# Altium PCB PCB.PcbDoc
Units mm, origin at the board's own origin, x right, y up, seen from the top; angles counter-clockwise.
Board outline 41 x 25.36 mm, 2 copper layers (TOP, BOTTOM), stack 1.586 mm thick; 47 components, 24 nets, 125 pads, 65 vias.
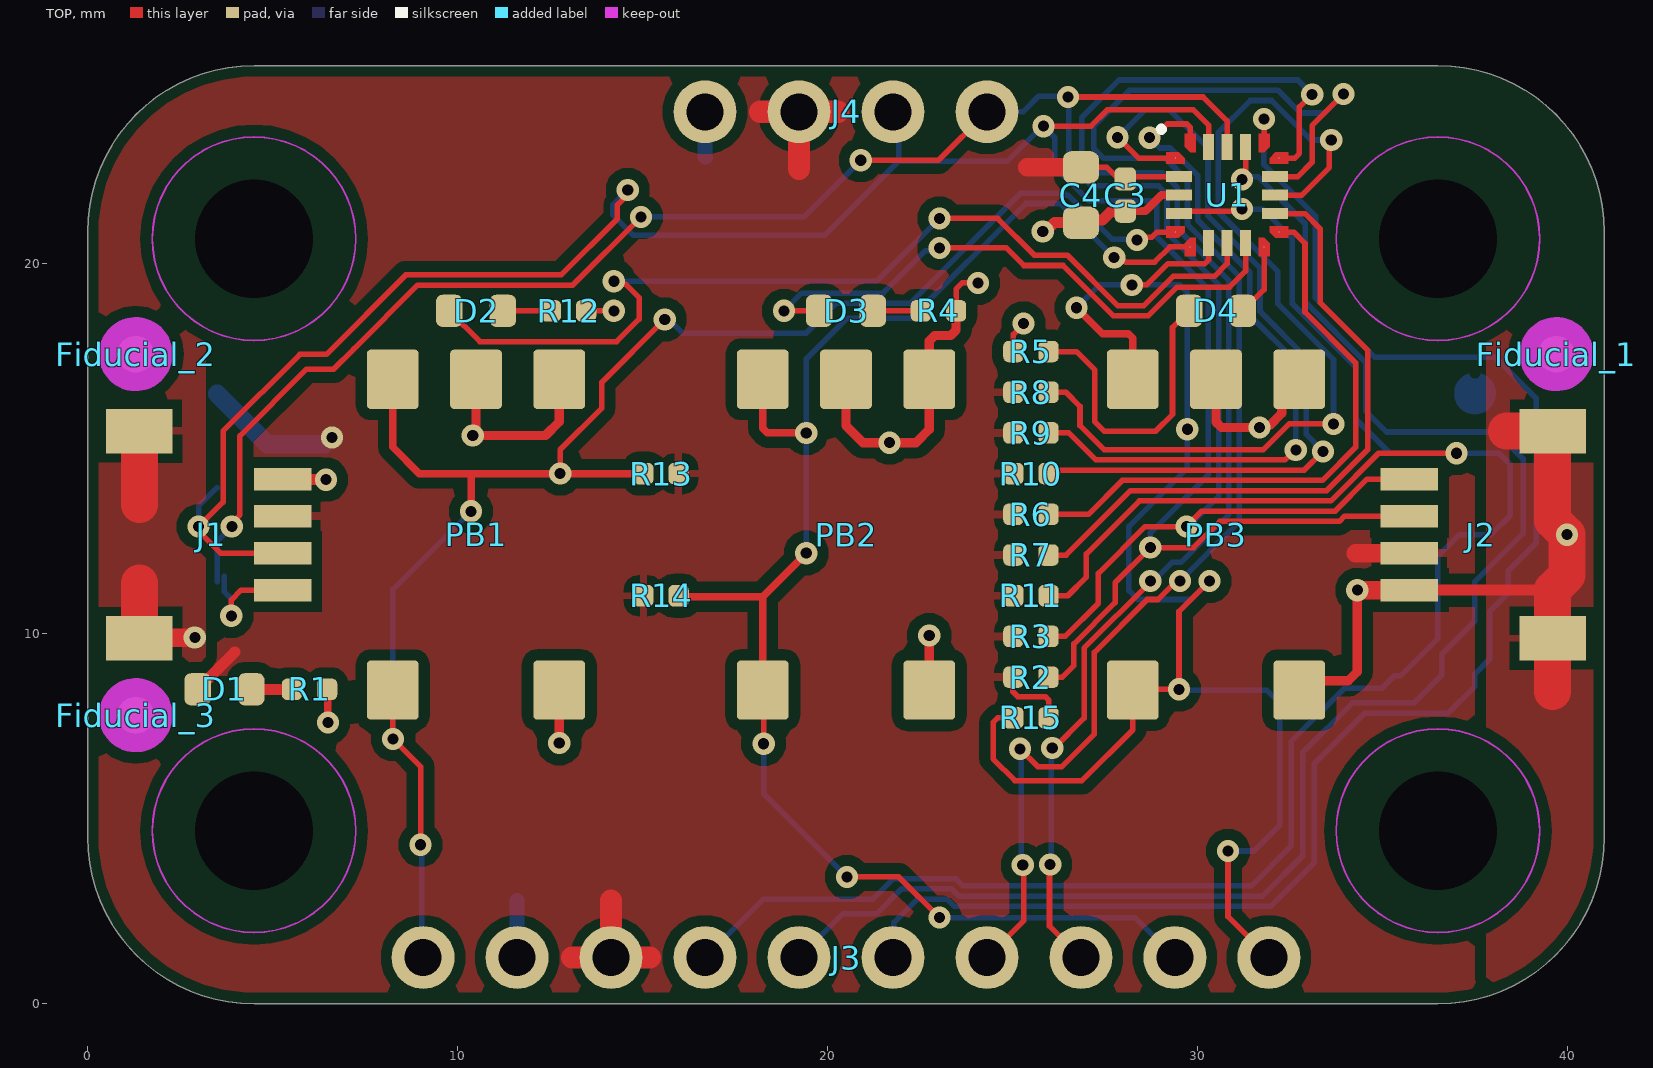
[diagram p0: TOP view]
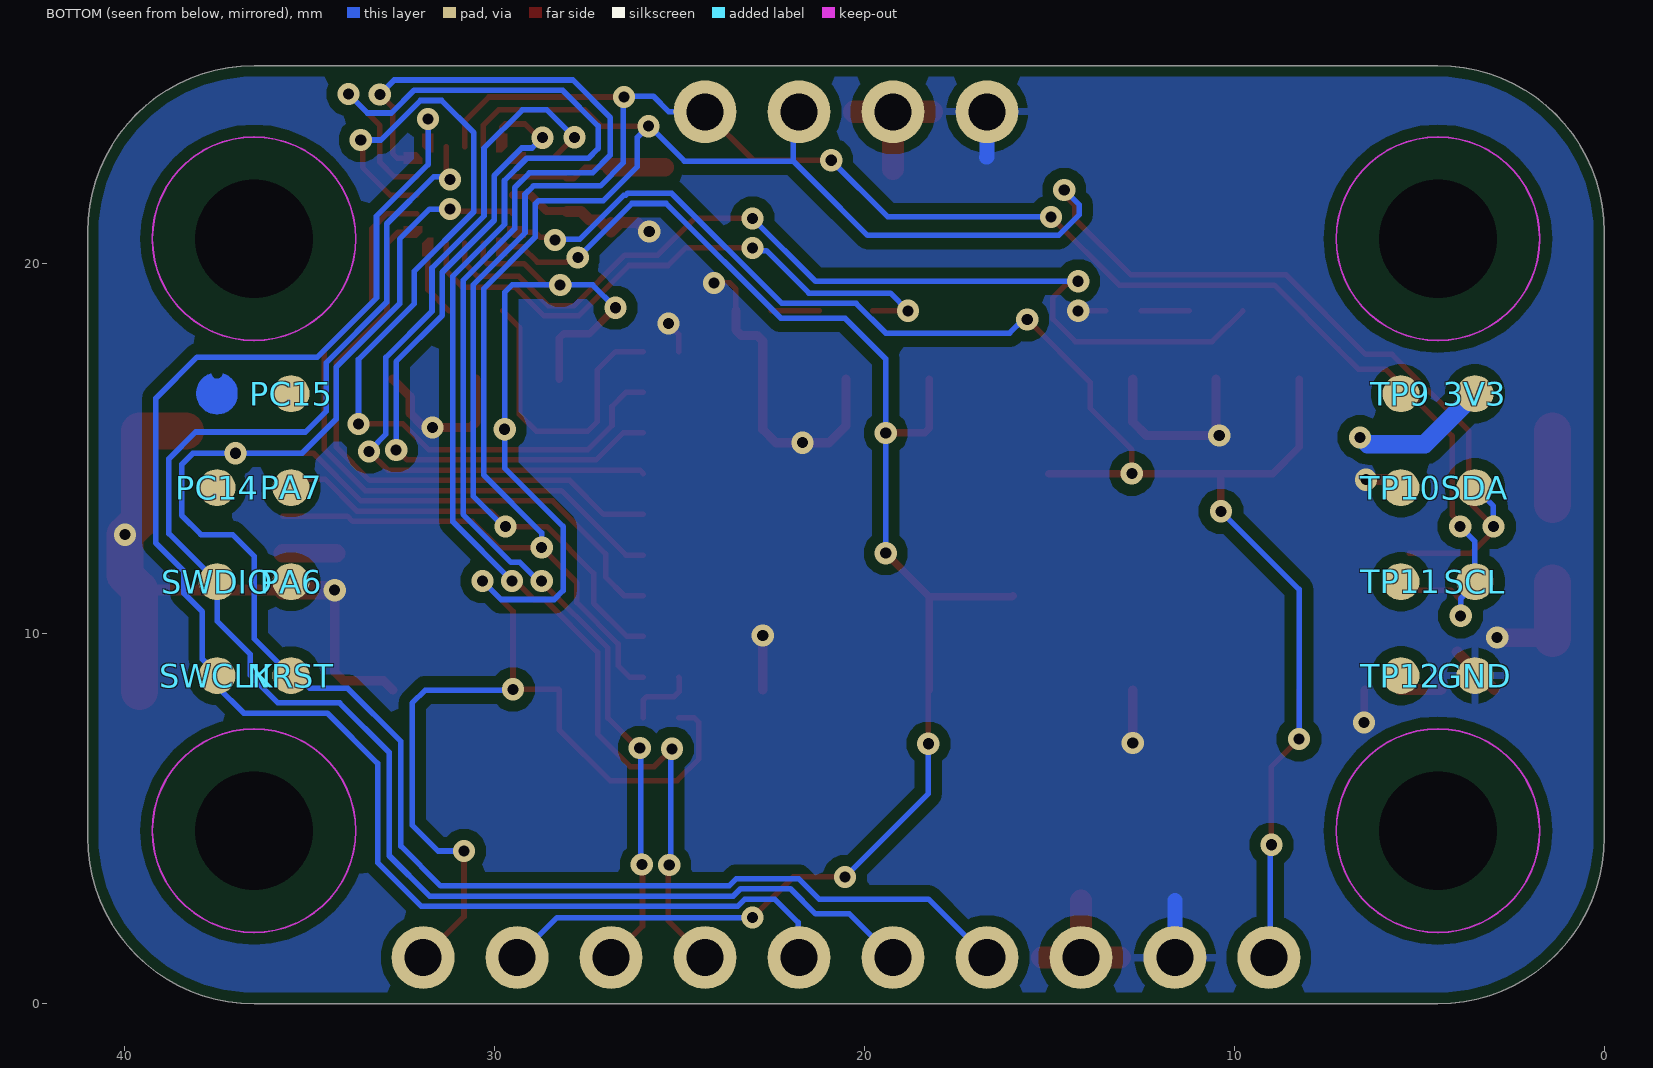
[diagram p1: BOTTOM view, seen from below]
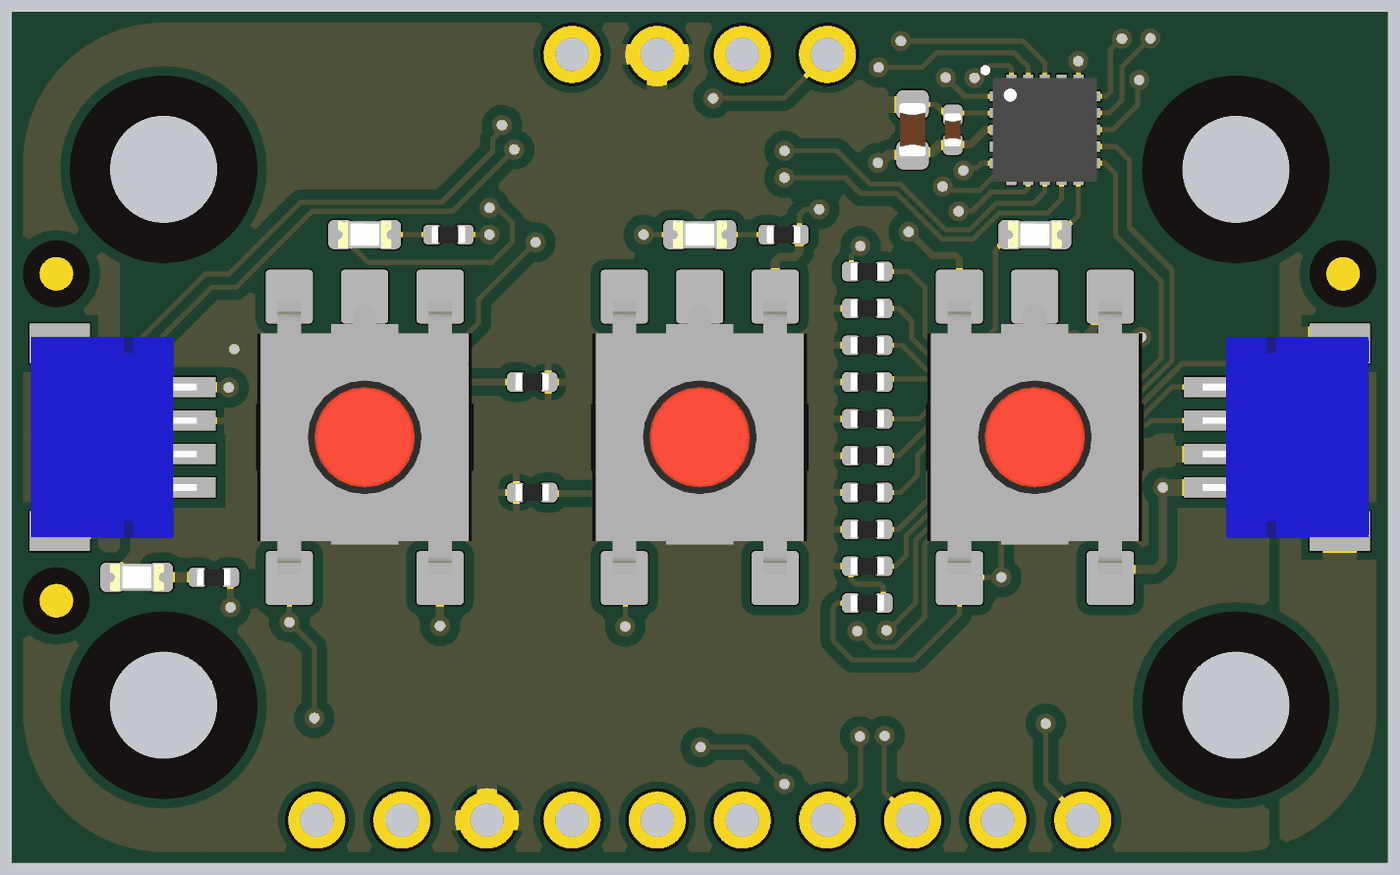
[diagram p2: 3D render of the assembled board from above, using the file's embedded part models]

## Layer stack, top to bottom
Top Solder: solder mask 0.01, Solder Resist, Dk 3.5
TOP: signal copper 0.018
Dielectric: core 1.55, FR-4, Dk 4.8
BOTTOM: signal copper 0.018
Bottom Solder: solder mask 0.01, Solder Resist, Dk 3.5

## Board outline
0,4.5 ccw(c4.5,4.5) 4.5,0 36.5,0 ccw(c36.5,4.5) 41,4.5 41,20.86 ccw(c36.5,20.86) 36.5,25.36 4.5,25.36 ccw(c4.5,20.86) 0,20.86

## Design rules (kind name [scope] priority, off if disabled: settings)
BoardOutlineClearance Mousebites [(ObjectKind = 'Pad') And (Name = 'Free-MOUSEBITE')] p1: gap=0 ignorepadtopadclearanceinfootprint=FALSE
BoardOutlineClearance Silks [(OnLayer('Top Overlay') OR OnLayer('Bottom Overlay'))] p2: gap=0 ignorepadtopadclearanceinfootprint=FALSE
BoardOutlineClearance [All] p3: gap=0.3 ignorepadtopadclearanceinfootprint=FALSE
Clearance COPPER_0.3mm [All] p1: gap=0.127 ignorepadtopadclearanceinfootprint=FALSE except(0.3: Arc-Fill Arc-Poly Arc-Region Track-Fill Track-Poly Track-Region SMDPad-Fill SMDPad-Poly SMDPad-Region THPad-Fill THPad-Poly THPad-Region Via-Fill Via-Poly Via-Region Fill-Fill Fill-Poly Fill-Region Poly-Poly Poly-Region Region-Region)
Clearance "Generic clearance 0.15mm" [All] p2: gap=0.15 ignorepadtopadclearanceinfootprint=TRUE
ComponentClearance [All] p1: gap=0.2 collisioncheckmode=3 verticalgap=0 showdistances=TRUE
DiffPairsRouting USB [InDifferentialPairClass('USB')] p1: maxlimit=0.15 minlimit=0.15 mostfreqgap=0.15 toplayer_minwidth=0.15 toplayer_maxwidth=0.21 toplayer_prefwidth=0.2 bottomlayer_minwidth=0.15 bottomlayer_maxwidth=0.21 bottomlayer_prefwidth=0.2 impedanceprofiledriven=TRUE impedanceprofileid={E6B00C31-4C8E-439C-824F-D2B2CDC26F9C} impedanceprofilevalue=90.000000 maxuncoupledlength=12.7
Height [All] p1: minheight=0 maxheight=30 prefheight=12.7
HoleSize [All] p1: absolutevalues=TRUE maxlimit=30 minlimit=0.3 maxpercent=80.000 minpercent=20.000
HoleToHoleClearance [All] p1: gap=0.25 allowstackedmicrovias=FALSE
MinimumAnnularRing [All] p1: minimumring=0.15
PlaneConnect [All] p1: pad.planeconnectstyle=Relief pad.reliefexpansion=0.508 pad.reliefentries=4 pad.reliefconductorwidth=0.254 pad.reliefairgap=0.254 via.planeconnectstyle=Direct via.reliefexpansion=0.508 via.reliefentries=4 via.reliefconductorwidth=0.254 via.reliefairgap=0.254
PolygonConnect [All] p1: thpad.connectstyle=Relief thpad.reliefconductorwidth=0.2 thpad.reliefentries=4 thpad.polygonreliefangle="90 Angle" thpad.airgapwidth=0.254 smdpad.connectstyle=Relief smdpad.reliefconductorwidth=0.2 smdpad.reliefentries=4 smdpad.polygonreliefangle="90 Angle" smdpad.airgapwidth=0.254 via.connectstyle=Direct via.reliefconductorwidth=0.254 via.reliefentries=4 via.polygonreliefangle="90 Angle" via.airgapwidth=0.254
RoomDefinition TOP [InComponentClass('TOP')] p1: confinementstyle=ConfineIn formatcopy=TRUE lockcomponents=FALSE outline -26.2,-22.88 24.6,-22.88 24.6,2.52 -26.2,2.52
RoutingVias StandardVias [All] p1: holewidth=0.3 width=0.6 viastyle="Through Hole" minholewidth=0.3 minwidth=0.6 maxholewidth=0.3 maxwidth=0.6
SMDToCorner [All] p1: distance=39370
SilkToSilkClearance [All] p1: silktosilkclearance=0.2
SilkToSolderMaskClearance [IsPad] p1: minsilkscreentomaskgap=0.15 clearancetoexposedcopper=TRUE
SolderMaskExpansion VIAtented [IsVia] p1: expansion=0.102 istentingtop=TRUE
SolderMaskExpansion [All] p2: expansion=0.05 istentingtop=FALSE
UnConnectedPin [All] p1:
UnRoutedNet [not WithinRoom('K36')] p1: checkbadconnections=TRUE
ViasUnderSMD [All] p1: allowed=FALSE
Width StandardTraces [All] p1: maxlimit=5 minlimit=0.15 preferedwidth=0.15 minimp=50.000000 maximp=50.000000 favimp=50.000000
21 further rules are at their usual default settings.

## Classes and differential pairs
component class TOP: 3V3 D1 D2 D3 D4 Fiducial_1 Fiducial_2 Fiducial_3 GND J1 J2 J3 J4 NRST PA6 PA7 PB1 PB2 PB3 PC14 PC15 R1 R4 R5 R12 R13 R14 R15 SCL SDA SWCLK SWDIO TP9 TP10 TP11 TP12
component class U_MICROCONTROLLER: C3 C4 R2 R3 R6 R7 R8 R9 R10 R11 U1

## Components (designator, comment, footprint, x,y, rotation, side; value= is the part's Value field where it differs from the comment)
3V3 "Test point 1.00mm" TP-1.00MM 3.5,16.49 r90 bottom
C3 "0402B104K160CT" CAP-0402 28.05,21.86 r270 top value=100nF
C4 "GRM188R61C475KAAJD" CAP-0603 26.85,21.86 r90 top value=4.7µF
D1 "HSMG-C190" LEDC1608X80N-AK 3.7,8.5 r180 top
D2 "KPT-1608SECK" LEDC1608X80N-AK 10.5,18.73 r180 top
D3 "KPT-1608SECK" LEDC1608X80N-AK 20.5,18.73 r180 top
D4 "KPT-1608SECK" LEDC1608X80N-AK 30.5,18.73 r0 top
Fiducial_1 "Fiducial mark 1mm" "Fiducial mark 1mm-Footprint-1" 39.7,17.56 r270 top
Fiducial_2 "Fiducial mark 1mm" "Fiducial mark 1mm-Footprint-1" 1.3,17.56 r270 top
Fiducial_3 "Fiducial mark 1mm" "Fiducial mark 1mm-Footprint-1" 1.3,7.8 r270 top
GND "Test point 1.00mm" TP-1.00MM 3.5,8.87 r90 bottom
J1 "SM04B-SRSS-TB(LF)(SN)" SM04B-SRSS-TB(LF)(SN)-Footprint-1 3.337,12.68 r90 top locked
J2 "SM04B-SRSS-TB(LF)(SN)" SM04B-SRSS-TB(LF)(SN)-Footprint-1 37.663,12.68 r270 top locked
J3 "HEADER TH 2.54mm VERT. 1x010POS" "PIN HEADER 2.54mm VERT. 1x10POS" 20.5,1.25 r0 top
J4 "HEADER TH 2.54mm VERT. 1x004POS" "PIN HEADER 2.54mm VERT. 1x4POS-Footprint-1" 20.5,24.11 r0 top
NRST "Test point 1.00mm" TP-1.00MM 35.5,8.87 r180 bottom
PA6 "Test point 1.00mm" TP-1.00MM 35.5,11.41 r180 bottom
PA7 "Test point 1.00mm" TP-1.00MM 35.5,13.95 r180 bottom
PB1 "IT-1157AHNP-W160GGTR" TS42 10.5,12.68 r90 top locked
PB2 "IT-1157AHNP-W160GGTR" TS42 20.5,12.68 r90 top locked
PB3 "IT-1157AHNP-W160GGTR" TS42 30.5,12.68 r90 top locked
PC14 "Test point 1.00mm" TP-1.00MM 37.5,13.95 r180 bottom
PC15 "Test point 1.00mm" TP-1.00MM 35.5,16.49 r180 bottom
R1 "CRCW04021K00FKEDC" RES-0402 6,8.5 r180 top value=1k
R2 "RC0402FR-074K7L" RES-0402 25.5,8.83 r180 top value=4.7k
R3 "RC0402FR-074K7L" RES-0402 25.5,9.93 r180 top value=4.7k
R4 "CRCW0402330RJNED" RES-0402 23,18.73 r180 top value=330
R5 "CRCW0402330RJNED" RES-0402 25.5,17.63 r0 top value=330
R6 "RC0402FR-074K7L" RES-0402 25.5,13.23 r0 top value=4.7k
R7 "RC0402FR-074K7L" RES-0402 25.5,12.13 r0 top value=4.7k
R8 "RC0402FR-074K7L" RES-0402 25.5,16.53 r0 top value=4.7k
R9 "RC0402FR-074K7L" RES-0402 25.5,15.43 r0 top value=4.7k
R10 "RC0402FR-074K7L" RES-0402 25.5,14.33 r0 top value=4.7k
R11 "RC0402FR-074K7L" RES-0402 25.5,11.03 r0 top value=4.7k
R12 "CRCW0402330RJNED" RES-0402 13,18.73 r180 top value=330
R13 "RC0402FR-074K7L" RES-0402 15.5,14.33 r0 top value=4.7k
R14 "RC0402FR-074K7L" RES-0402 15.5,11.03 r180 top value=4.7k
R15 "RC0402FR-074K7L" RES-0402 25.5,7.73 r0 top value=4.7k
SCL "Test point 1.00mm" TP-1.00MM 3.5,11.41 r90 bottom
SDA "Test point 1.00mm" TP-1.00MM 3.5,13.95 r90 bottom
SWCLK "Test point 1.00mm" TP-1.00MM 37.5,8.87 r180 bottom
SWDIO "Test point 1.00mm" TP-1.00MM 37.5,11.41 r180 bottom
TP9 "Test point 1.00mm" TP-1.00MM 5.5,16.49 r0 bottom
TP10 "Test point 1.00mm" TP-1.00MM 5.5,13.95 r0 bottom
TP11 "Test point 1.00mm" TP-1.00MM 5.5,11.41 r0 bottom
TP12 "Test point 1.00mm" TP-1.00MM 5.5,8.87 r0 bottom
U1 "STM32C011F4U6TR" UFQFPN20 30.8,21.86 r0 top

## Footprints (in the part's own frame and the unit in brackets; to place one, negate y for a bottom-side part, rotate by r counter-clockwise, add the part's x,y. Pads: shape width x height; smd on the part's side, far side on the other; paste and mask are expansions set on the pad)
CAP-0402 [mm] "Chip Capacitor, 2-Leads, Body  0402 (in) 1005 (mm), IPC Medium Density"
  rrect52% 0.63x0.58 smd mask+0.05: 1(-0.435,0) 2(0.435,0)
  body extent -0.5,-0.25 0.5,0.25, height 0.5
CAP-0603 [mm] "Chip Capacitor, Body 0603 imperial,1.6x0.8mm, IPC High Density"
  rrect51% 0.87x0.97 smd mask+0.05: 1(-0.75,0) 2(0.75,0)
  body extent -0.8,-0.4 0.8,0.4, height 0.8
"Fiducial mark 1mm-Footprint-1" [mm]
  round 1 smd paste-10 mask+0.5: 1(0,0)
  TOP keep-out circle w1: c0,0 r0.5
LEDC1608X80N-AK [mm]
  rrect50% 0.72x0.87 smd: A(0.725,0) C(-0.725,0)
  body extent -0.8,-0.4 0.8,0.4, height 0.79
"PIN HEADER 2.54mm VERT. 1x4POS-Footprint-1" [mm]
  round 1.7 hole 1 mask+0.1: 1(-3.81,0) 2(-1.27,0) 3(1.27,0) 4(3.81,0)
"PIN HEADER 2.54mm VERT. 1x10POS" [mm]
  round 1.7 hole 1 mask+0.1: 1(-11.43,0) 2(-8.89,0) 3(-6.35,0) 4(-3.81,0) 5(-1.27,0) 6(1.27,0) 7(3.81,0) 8(6.35,0) 9(8.89,0) 10(11.43,0)
RES-0402 [mm] "Chip Resistor, 2-Leads, Body  0402 (in) 1005 (mm), IPC Medium Density"
  rrect51% 0.55x0.58 smd mask+0.05: 1(-0.475,0) 2(0.475,0)
  body extent -0.5,-0.25 0.5,0.25, height 0.34
SM04B-SRSS-TB(LF)(SN)-Footprint-1 [mm]
  rect 0.6x1.55 smd mask+0.05: 1(1.5,-1.937) 2(0.5,-1.937) 3(-0.5,-1.937) 4(-1.5,-1.937)
  rect 1.2x1.8 smd mask+0.05: FIX(-2.8,1.938) FIX(2.8,1.938)
  body extent -3,-2.16 3,2.8, height 2.98
TP-1.00MM [mm]
  rrect100% 1x1 smd paste-2.54: X(0,0)
TS42 [mm]
  rrect15% 1.6x1.4 smd: 1(4.2,-2.25) 2(-4.2,-2.25) 3(4.2,2.25) 4(-4.2,2.25)
  rrect15% 1.6x1.4 smd paste+0: 5(4.2,0)
  body extent -4.1,-3.25 4.1,3.25, height 2.6
UFQFPN20 [mm] "QFN, 20-Leads, Body 3.00x3.00mm, Pitch 0.50mm, IPC Medium Density"
  round 0.025 smd mask+0.05: 1(-1.4,1) 5(-1.4,-1) 6(-1,-1.4) 10(1,-1.4) 11(1.4,-1) 15(1.4,1) 16(1,1.4) 20(-1,1.4)
  rect 0.7x0.3 smd mask+0.05: 2(-1.3,0.5) 3(-1.3,0) 4(-1.3,-0.5) 12(1.3,-0.5) 13(1.3,0) 14(1.3,0.5)
  rect 0.3x0.7 smd mask+0.05: 7(-0.5,-1.3) 8(0,-1.3) 9(0.5,-1.3) 17(0.5,1.3) 18(0,1.3) 19(-0.5,1.3)
  TOP region: -0.85,-1.65 -1.15,-1.65 -1.15,-1.3 -1,-1.15 -0.85,-1.15
  TOP region: -1.3,-1.15 -1.15,-1 -1.15,-0.85 -1.65,-0.85 -1.65,-1.15
  TOP region: 1.15,-1.65 0.85,-1.65 0.85,-1.15 1,-1.15 1.15,-1.3
  TOP region: 1.65,1.15 1.65,0.85 1.15,0.85 1.15,1 1.3,1.15
  TOP region: 1,1.15 0.85,1.15 0.85,1.65 1.15,1.65 1.15,1.3
  TOP region: -1.15,1 -1.15,0.85 -1.65,0.85 -1.65,1.15 -1.3,1.15
  TOP region: -1.15,1.3 -1,1.15 -0.85,1.15 -0.85,1.65 -1.15,1.65
  TOP region: 1.65,-0.85 1.65,-1.15 1.3,-1.15 1.15,-1 1.15,-0.85
  silkscreen extent -1.8,1.75 -1.75,1.8, body extent -1.55,-1.55 1.55,1.55, height 0.6

## Part data
3V3 GND NRST PA6 PA7 PC14 PC15 SCL SDA SWCLK SWDIO TP9 TP10 TP11 TP12: library part UT0013-A.6, Manufacturer="This is not a component", Code Arduino="This is not a component", Design Item ID=CMP-018-0005-A.3, Part Number="This is not a component", Pin Count=1, Source=ut.SchLib
C3: library part C0012-A.15, "CAP CHIP 0402 100nF 10% 16V X7R", Case Code (Imperial)=0402, Dielectric=X7R, Manufacturer=Walsin, Tolerance=10%, Voltage=16V, Code Arduino=0132, Part Number=0402B104K160CT, Technology=Ceramic
C4: library part C0054-A.16, "CAP CHIP 0603 4.7uF 10% 16V X5R", Case Code (Imperial)=0603, Dielectric=X5R, Manufacturer=Murata, Manufacturer 3="Samsung Electro-Mechanics", Part number 2=GRM188R61C475KE11D, Part number 3=CL10A475KO8NNNC, Tolerance=10%, Voltage=16V, Code Arduino=A5072, Manufacturer 2=Murata, Part Number=GRM188R61C475KAAJD, Technology=Ceramic
D1: library part L0009-A.5, "LED SMD 0603 GREEN/568 15mcd 120^", Manufacturer=Broadcom, Code Arduino=2204, Part Number=HSMG-C190, Pin Count=2
D2 D3 D4: library part L0006-A.5, "LED SMD 0603 ORANGE601 250mcd 120^", Manufacturer=Kingbright, Code Arduino=2207, Part Number=KPT-1608SECK, Pin Count=2
Fiducial_1 Fiducial_2 Fiducial_3: library part UT0023-A.7, "Fiducial mark 1mm clearance 2mm"
J1 J2: library part J0005-A.2, "CONN JST 4POS SIDE 1MM TIN QWIIC", Manufacturer=JST, Code Arduino=J0005, Part Number=SM04B-SRSS-TB(LF)(SN)
J3: library part J0169-A.8, Code Arduino=J0169
J4: library part J0162-A.5, Code Arduino=J0162
PB1 PB2 PB3: library part B0005-A.9, "PUSHBUTTON SMD 6x6 5 PINS", Manufacturer=Switronic, Code Arduino=0946, Part Number=IT-1157AHNP-W160GGTR
R1: library part R0007-A.24, "RES CHIP 0402 1k 1% 1/16W", Case Code (Imperial)=0402, Manufacturer=Vishay, Power=62.5mW, Temperature Coefficient=100ppm, Tolerance=1%, Code Arduino=0140, Part Number=CRCW04021K00FKEDC, Technology="Thick film"
R2 R3 R6 R7 R8 R9 R10 R11 R13 R14 R15: library part R0013-A.24, "RES CHIP 0402 4k7 1% 1/16W", Case Code (Imperial)=0402, Manufacturer=YAGEO, Power=62.5mW, Temperature Coefficient=200ppm, Tolerance=1%, Code Arduino=2196, Part Number=RC0402FR-074K7L, Technology="Thick film"
R4 R5 R12: library part R0017-A.24, "RES CHIP 0402 330R 5% 1/16W", Case Code (Imperial)=0402, Manufacturer=Vishay, Power=62.5mW, Temperature Coefficient=200ppm, Tolerance=5%, Code Arduino=2229, Part Number=CRCW0402330RJNED, Technology="Thick film"
U1: library part U0363-A.3, "IC Cortex M0, 32b MCU, 32KB Flash, 6KB RAM, VDD 2-3.6V, -40°C to 85°C, QFN20 3x3mm", Manufacturer="ST Microelectronics", Code Arduino=U0363, Part Number=STM32C011F4U6TR

## Free pads (board coordinates)
  round 3 hole 3.2 unplated paste-2539.97 mask+1.3: MH(4.5,4.68) MH(4.5,20.68) MH(36.5,4.68) MH(36.5,20.68)

## Via types
v1: diameter 0.6, hole 0.3, TOP to BOTTOM, tented both sides, 65 vias

## Nets (pads, with @x,y where several pads share a name; then routed paths per layer and width w, separated by ;. In a path a pad name is that pad's centre, name@x,y a point inside that pad or via, vN(x,y) a via of type N, cw(c..) or ccw(c..) an arc to the next point about the centre after c; other vN are vias at no path point)
+3V3: 3V3.X C3.1 C4.2 D1.A J1.2 J2.2 J3.3 J4.2 R2.2 R3.2 R6.1 R7.1 R8.1 R9.1 R10.1 R11.1 R13.2 R14.2 R15.2 U1.2 | length 20.1
  TOP w0.15: R2.2 25.007,8.812 25.007,8.44 25.148,8.299 25.887,8.299 25.975,8.211 R15.2 ; C4.2 27.55,22.61 27.865,22.295 C3.1 28.115,22.36 U1.2
  TOP w0.3: D1.A 3.98,9.505
  TOP w0.5: 25.4,22.61 C4.2 ; 34.28,12.18 J2.2
  TOP w0.6: 13.1,1.25 J3.3 ; 14.15,2.79 J3.3 ; 15.2,1.25 J3.3 ; 18.18,24.11 J4.2 ; 19.23,22.57 J4.2 ; 20.28,24.11 J4.2
  BOTTOM w0.5: 3V3.X 4.86,15.13 5.4,15.13 ; 5.401,15.131 6.401,15.131 6.58,15.31 v1(6.607,15.31)
GND: C3.2 C4.1 GND.X J1.1 J1.FIX J2.1 J2.FIX J3.2 J4.1 PB1.1 PB1.2 PB1.5 PB2.1 PB2.2 PB2.5 PB3.1 PB3.2 PB3.5 R1.1 R4.1 R5.1 R12.1 U1.3 | length 55.1
  TOP w0.15: R12.1 v1(14.225,18.73) ; R4.1 23.475,19.319 23.64,19.484 v1(24.066,19.484) ; R5.1 25.025,18.092 25.295,18.362 v1(25.295,18.387)
  TOP w0.2: R1.1 6.488,8.488 6.488,7.612 v1(6.5,7.6)
  TOP w0.22: C3.2 28.592,21.425 29.027,21.86 U1.3
  TOP w0.25: v1(10.411,15.361) v1@10.5,15.361 ; PB1.5 v1@10.5,15.361 ; v1(12.75,7.05) PB1.2 ; PB1.1 12.75,15.731 12.379,15.361 v1@10.5,15.361 ; PB2.5 20.5,15.626 20.96,15.167 v1(21.675,15.167) 22.391,15.167 22.75,15.526 22.75,17.917 22.896,18.063 23.329,18.063 23.475,18.21 R4.1 ; PB2.2 v1(22.75,9.955) ; PB3.5 30.5,15.726 30.646,15.58 v1(31.672,15.58) 31.739,15.647 31.965,15.647 32.28,15.962 32.28,16.41 PB3.1 ; PB3.2 33,8.73 34.075,8.73 34.32,8.975 v1(34.32,11.18)
  TOP w0.3: J1.1 5.281,14.173 6.437,14.173 v1(6.444,14.166) ; v1(25.818,20.874) 25.892,20.874 26.138,21.12 26.521,21.12 26.531,21.13 26.584,21.13 C4.1@26.852,20.862 ; C4.1 26.852,21.108 C4.1@26.852,20.862 ; C3.2@28.039,21.414 27.66,21.414 27.435,21.189 27.18,21.189 27.128,21.137 C4.1@26.852,20.862 ; J2.1 39.581,11.18 39.601,11.2
  TOP w0.5: J1.FIX@1.399,9.88 1.419,9.9 v1(2.9,9.9) ; v1(34.32,11.18) J2.1
  TOP w1: J1.FIX@1.399,9.88 1.399,11.379 ; 1.399,13.499 J1.FIX@1.399,15.48 ; 38.353,15.48 39.601,15.48 39.601,13.065 v1(39.985,12.68) 39.985,11.585 39.601,11.2 39.601,9.88 39.601,8.443
  BOTTOM w0.4: J3.2 11.61,2.79 ; J4.1 16.69,22.89 16.7,22.88
NetD1_C: D1.C R1.2 | length 1.1
  TOP w0.3: D1.C R1.2
NetD2_C: D2.C R12.2 | length 1.3
  TOP w0.15: D2.C R12.2
NetD3_C: D3.C R4.2 | length 1.3
  TOP w0.15: D3.C R4.2
NetD4_C: D4.C R5.2 | length 8.2
  TOP w0.15: R5.2 26.725,17.63 27.225,17.13 27.225,15.73 27.478,15.477 28.872,15.477 29.325,15.93 29.325,18.28 D4.C
PA0_1: J3.1 PB1.3 PB1.4 R13.1 U1.5 | length 46
  TOP w0.15: PB1.4 8.255,8.475 v1(8.255,7.156) 9,6.41 v1(9,4.3) ; v1(12.775,14.33) 12.775,14.975 13.9,16.1 13.9,16.8 v1(15.6,18.5) ; v1(28.367,20.642) 28.449,20.724 28.767,20.724 28.902,20.86 U1.5
  TOP w0.2: PB1.3 8.25,15.05 8.97,14.33 10.375,14.33 ; v1(10.367,13.312) 10.375,13.319 10.375,14.33 ; R13.1 v1(12.775,14.33) 10.375,14.33
  BOTTOM w0.15: v1(8.255,7.156) 8.255,11.199 v1(10.367,13.312) ; v1(9,4.3) 9.035,4.265 9.035,1.285 J3.1 ; v1(15.6,18.5) 15.709,18.5 16.079,18.13 19.425,18.13 20.225,18.93 22.235,18.93 25.214,21.909 26.4,21.909 26.449,21.86 26.505,21.86 27.694,20.671 28.338,20.671 v1(28.367,20.642)
PA1_1: J3.9 PB2.3 PB2.4 R14.1 U1.6 | length 43
  TOP w0.15: PB2.4 18.275,8.455 v1(18.275,7.03) ; v1(20.525,3.43) 21.925,3.43 v1(23.025,2.33) ; v1(27.749,20.169) 27.835,20.083 28.025,20.083 28.062,20.046 28.841,20.046 29.255,20.46 U1.6
  TOP w0.2: R14.1 16,11.005 18.25,11.005 ; PB2.4 18.25,11.005 ; PB2.3 18.25,15.555 18.375,15.43 v1(19.425,15.43) v1@19.448,15.453 ; v1(19.425,12.18) 18.25,11.005
  BOTTOM w0.15: v1(18.275,7.03) 18.275,5.68 v1(20.525,3.43) ; v1(19.425,12.18) v1(19.425,15.43) 19.425,17.43 20.525,18.53 22.261,18.53 25.363,21.632 26.286,21.632 v1(27.749,20.169) ; v1(23.025,2.33) 28.31,2.33 J3.9
PA2_1: J3.10 PB3.3 PB3.4 R15.1 U1.7 | length 43.3
  TOP w0.15: R15.1 24.6,7.73 24.475,7.605 24.475,6.618 25.063,6.03 26.875,6.03 28.25,7.405 PB3.4 28.27,8.5 v1(29.5,8.5) 29.5,10.605 v1(30.325,11.43) ; v1(28.225,19.43) 28.625,19.43 29.203,20.008 30.198,20.008 30.3,20.11 U1.7 ; v1(30.825,4.13) 30.825,2.355 J3.10
  TOP w0.2: v1@26.741,18.806 27.434,18.113 28.133,18.113 28.25,17.995 PB3.3
  BOTTOM w0.15: v1(26.733,18.814) 27.349,19.43 29.525,19.43 29.725,19.23 v1(29.725,15.53) 29.725,14.48 28.146,12.901 28.146,11.168 28.386,10.928 29.823,10.928 v1(30.325,11.43) ; v1(29.5,8.5) 29.52,8.48 31.87,8.48 32.225,8.125 32.225,4.83 31.525,4.13 v1(30.825,4.13)
PA3_1: D2.A U1.8 | length 26.5
  TOP w0.15: D2.A 10.605,17.9 14.3,17.9 14.907,18.507 14.907,19.086 14.549,19.444 14.311,19.444 v1(14.225,19.53) ; v1(23.025,21.23) 24.597,21.23 25.594,20.233 26.481,20.233 27.843,18.871 28.551,18.871 28.936,19.257 28.936,19.258 29.34,19.662 30.457,19.662 30.8,20.005 U1.8
  BOTTOM w0.15: v1(14.225,19.53) 21.325,19.53 v1(23.025,21.23)
PA4_1: D3.A U1.9 | length 16.1
  TOP w0.15: v1(18.825,18.73) D3.A ; v1(23.025,20.43) 24.833,20.43 25.307,19.956 26.367,19.956 27.728,18.594 28.665,18.594 29.213,19.142 29.213,19.143 29.443,19.373 30.868,19.373 31.3,19.805 U1.9
  BOTTOM w0.15: v1(18.825,18.73) 19.302,19.207 21.502,19.207 22.654,20.359 22.954,20.359 v1(23.025,20.43)
PA5_1: D4.A U1.10 | length 2
  TOP w0.15: D4.A 31.8,19.305 U1.10
PA6_2: R6.2 U1.11 | length 16
  TOP w0.15: R6.2 27.05,13.23 27.967,14.147 33.379,14.147 34.277,15.045 34.277,17.323 32.906,18.694 32.906,20.556 32.602,20.86 U1.11
PA7_2: R7.2 U1.12 | length 17.7
  TOP w0.15: R7.2 26.45,12.13 28.19,13.87 33.494,13.87 34.6,14.976 34.6,17.67 33.317,18.953 33.317,20.949 32.907,21.36 U1.12
PA8_2: R8.2 U1.13 | length 24.5
  TOP w0.15: R8.2 26.441,16.53 26.825,16.146 26.825,15.63 27.477,14.978 31.78,14.978 32.484,15.682 33.666,15.682 v1(33.676,15.672) ; U1.13 32.822,21.86 33.567,22.605 33.567,23.3 v1(33.615,23.347)
  BOTTOM w0.15: v1(33.615,23.347) 33.07,23.347 32.002,24.415 31.431,24.415 30.561,23.545 30.561,21.409 32.168,19.802 32.168,18.927 33.676,17.419 v1(33.676,15.672)
PA9_USART1_TX_1: J3.7 U1.14 | length 40.5
  TOP w0.15: J3.7 25.3,2.24 25.3,3.727 v1(25.278,3.749) ; v1(25.202,6.892) 25.683,6.412 26.336,6.412 27.215,7.291 27.215,9.501 28.642,10.928 28.933,10.928 29.435,11.43 v1(29.525,11.43) ; U1.14 32.712,22.36 33.099,22.747 33.099,23.739 v1(33.95,24.59)
  BOTTOM w0.15: v1(25.202,6.892) 25.24,6.854 25.24,3.786 v1(25.278,3.749) ; v1(29.525,11.43) 31.125,13.03 31.125,16.67 31.123,16.672 31.123,17.088 31.125,17.09 31.125,19.67 29.73,21.065 29.73,22.253 29.13,22.854 27.463,22.854 27.199,23.118 27.199,23.73 28.161,24.692 32.174,24.692 32.788,24.078 33.438,24.078 v1(33.95,24.59)
PA10_USART1_RX_1: J3.8 U1.15 | length 37.1
  TOP w0.15: v1(26.019,3.766) 26,3.747 26,2.1 J3.8 ; v1(26.074,6.914) 26.128,6.914 26.938,7.724 26.938,9.615 28.725,11.402 v1(28.725,11.43) ; U1.15 32.632,22.86 32.755,22.983 32.755,24.244 33.09,24.58 v1(33.1,24.58)
  BOTTOM w0.15: v1(26.019,3.766) 26.046,3.793 26.046,6.887 v1(26.074,6.914) ; v1(28.725,11.43) 28.815,11.43 29.317,11.932 29.554,11.932 30.848,13.226 30.848,16.555 30.846,16.557 30.846,17.203 30.848,17.205 30.848,19.555 29.453,20.95 29.453,22.063 29.056,22.46 27.35,22.46 26.871,22.939 26.871,23.956 27.885,24.969 32.711,24.969 v1(33.1,24.58)
PA13_SWDIO_1: J3.6 SWCLK.X U1.16 | length 42.7
  TOP w0.15: v1(31.795,23.913) 31.8,23.907 U1.16
  BOTTOM w0.15: J3.6 21.795,1.275 21.795,2.2 22.427,2.832 23.233,2.832 23.432,2.633 31.978,2.633 33.161,3.816 33.161,6.497 34.518,7.854 36.774,7.854 37.5,8.58 37.5,8.919 37.9,9.319 37.9,10.6 38.4,11.1 38.4,11.7 39.157,12.457 39.157,16.364 38.041,17.48 34.79,17.48 33.19,19.08 33.19,21.29 31.795,22.686 v1(31.795,23.913)
PA14_SWCLK_BOOT0_1: J3.5 SWDIO.X U1.17 | length 42.8
  TOP w0.15: v1(31.2,22.28) 31.286,22.366 31.286,22.548 31.3,22.562 U1.17
  BOTTOM w0.15: J3.5 20.41,2.43 21.325,2.43 22.004,3.109 23.348,3.109 23.547,2.91 31.754,2.91 32.845,4.001 32.845,6.794 34.186,8.134 35.854,8.134 36.6,8.88 36.6,9.445 37.5,10.345 SWDIO.X 38.8,12.71 38.8,14.733 38.078,15.455 35.114,15.455 34.554,16.015 34.554,17.325 32.913,18.966 32.913,21.084 31.637,22.359 31.279,22.359 v1(31.2,22.28)
PC14_2: R9.2 U1.20 | length 19.1
  TOP w0.15: R9.2 26.525,15.43 27.254,14.701 32.36,14.701 32.627,14.969 v1(32.658,14.969) ; v1(28.7,23.41) 28.808,23.41 29.178,23.781 29.712,23.781 29.8,23.693 U1.20
  BOTTOM w0.15: v1(28.7,23.41) 28.708,23.41 28.987,23.131 29.265,23.131 30.007,22.388 30.007,21.18 31.413,19.774 31.413,18.604 32.66,17.358 32.66,14.97 v1(32.658,14.969)
PC15_2: R10.2 U1.1 | length 22.1
  TOP w0.15: R10.2 26.069,14.424 32.886,14.424 v1(33.391,14.929) ; v1@27.85,23.42 28.41,22.86 U1.1
  BOTTOM w0.15: v1(27.84,23.42) 28.583,24.163 29.248,24.163 30.284,23.126 30.284,21.294 31.69,19.888 31.69,18.719 32.937,17.472 32.937,15.4 33.16,15.176 33.16,15.16 v1(33.391,14.929)
PF2_N\R\S\T\_1: J3.4 NRST.X R11.2 U1.4 | length 57.9
  TOP w0.15: R11.2 26.494,11.03 26.998,11.534 26.998,12.162 28.429,13.593 33.609,13.593 34.896,14.88 v1(37,14.88) ; U1.4 29.56,21.42 31.14,21.42 v1(31.2,21.48)
  BOTTOM w0.15: J3.4 18.27,2.83 21.225,2.83 21.781,3.386 23.462,3.386 23.661,3.187 31.456,3.187 32.53,4.261 32.53,7.091 33.969,8.53 34.991,8.53 35.331,8.87 NRST.X 36.5,9.87 36.5,12.103 37.078,12.68 37.934,12.68 38.454,13.2 38.454,14.579 38.153,14.88 35.2,14.88 34.277,15.803 34.277,17.21 32.566,18.921 32.566,20.667 31.753,21.48 v1(31.2,21.48)
SCL_1: J1.4 J2.4 J4.4 R3.1 SCL.X U1.18 | length 65.5
  TOP w0.15: v1(3.886,10.486) 3.886,10.916 4.15,11.18 J1.4 ; v1(3.9,12.9) 3.9,12.997 4.115,13.213 4.115,15.347 5.923,17.154 6.654,17.154 7.2,17.7 8.923,19.423 13.114,19.423 v1(14.962,21.27) ; v1(20.9,22.8) 23,22.8 J4.4 ; R3.1 26.424,9.93 27.321,10.827 27.321,11.636 28.585,12.9 v1(29.7,12.9) 30.116,13.316 33.724,13.316 34.587,14.18 J2.4 ; v1(26.5,24.51) 30.151,24.51 30.8,23.861 U1.18
  BOTTOM w0.15: SCL.X 3.5,12.5 v1(3.9,12.9) ; SCL.X@3.694,11.557 3.694,11.14 3.886,10.948 v1(3.886,10.486) ; v1(14.962,21.27) 19.37,21.27 v1(20.9,22.8) ; J4.4 25.288,24.11 25.71,24.532 26.478,24.532 v1(26.5,24.51) 26.516,24.494 26.516,22.735 27.141,22.11 28.947,22.11 29.176,21.88 29.176,20.835 30.571,19.44 30.571,17.319 30.569,17.317 30.569,16.442 30.571,16.44 30.571,13.717 29.754,12.9 v1(29.7,12.9)
SDA_1: J1.3 J2.3 J4.3 R2.1 SDA.X U1.19 | length 68.5
  TOP w0.15: J1.3 3.598,12.18 3.186,12.592 3,12.778 v1(3,12.9) 3.664,13.564 3.664,15.477 5.741,17.554 6.454,17.554 8.6,19.7 12.802,19.7 14.321,21.219 14.321,21.597 14.441,21.717 14.441,21.719 14.6,21.878 v1(14.6,22) ; v1(25.838,23.722) 27.122,23.722 27.56,24.16 29.888,24.16 30.3,23.748 U1.19 ; R2.1 26.35,8.83 26.661,9.141 26.661,9.73 27.775,10.844 27.775,11.38 v1(28.725,12.33) 29.894,12.33 30.603,13.039 33.838,13.039 33.979,13.18 J2.3
  BOTTOM w0.15: v1(3,12.9) 3,13.45 SDA.X ; v1(14.6,22) 14.2,21.6 14.2,21.322 14.754,20.768 19.918,20.768 21.355,22.205 21.926,22.776 ; J4.3 21.926,23.954 21.926,22.776 ; v1(28.725,12.33) 28.725,12.73 30.294,14.299 30.294,16.326 30.292,16.328 30.292,17.432 30.294,17.434 30.294,19.326 28.899,20.721 28.899,21.622 28.811,21.71 27.058,21.71 26.138,22.629 26.138,23.422 v1(25.838,23.722) 25.814,23.722 24.869,22.776 21.926,22.776
pads on no net: Fiducial_1.1 Fiducial_2.1 Fiducial_3.1 PA6.X PA7.X PC14.X PC15.X TP9.X TP10.X TP11.X TP12.X

## Polygon pours and split planes (outlines as drawn)
+3V3 on TOP "NONET_L04_P-001" (solid, remove dead copper, pour order 2): 0,4.5 ccw(c4.5,4.5) 4.5,0 36.5,0 ccw(c36.5,4.5) 41,4.5 41,20.86 ccw(c36.5,20.86) 36.5,25.36 4.5,25.36 ccw(c4.5,20.86) 0,20.86
GND on TOP "NONET_L04_P-001" (solid, remove dead copper, pour order 0): 0,25.36 0,0 3.2,0 3.2,25.36
GND on TOP "NONET_L04_P-001" (solid, remove dead copper, pour order 1): 41,25.36 41,0 37.8,0 37.8,25.36
GND on BOTTOM "NONET_L04_P-001" (solid, remove dead copper, pour order 3): 0,4.5 ccw(c4.5,4.5) 4.5,0 36.5,0 ccw(c36.5,4.5) 41,4.5 41,20.86 ccw(c36.5,20.86) 36.5,25.36 4.5,25.36 ccw(c4.5,20.86) 0,20.86

## Keep-outs
Keep-Out Layer:
  circle w0.05: c36.5,4.68 r2.75
  circle w0.05: c36.5,20.68 r2.75
  circle w0.05: c4.5,4.68 r2.75
  circle w0.05: c4.5,20.68 r2.75

## Other copper
BOTTOM:
  region: 589 vertices and 0 holes, not listed, extent 36.947,15.938 38.059,17.027

## Silkscreen, mask and mechanical layers (free items; w line width, h text height)
Route Tool Path:
  lines w2: -1,8.498 -1,16.86 ; 42,4.5 cw(c36.5,4.5) 36.5,-1 ; 42,8.498 42,16.86 ; -1,4.498 ccw(c4.5,4.5) 4.498,-1 ; -1,4.498 cw(c4.5,4.5) -1,4.5 ccw(c0,4.5) -1,4.498 ; -1,20.86 cw(c4.5,20.86) 4.5,26.36 ; -1,20.86 -1,20.86 ; 4.498,-1 ccw(c4.5,4.5) 4.5,-1 ; 4.498,-1 ccw(c4.5,0) 4.5,-1 ; 4.5,-1 36.5,-1 ; 4.5,26.36 36.5,26.36 ; 4.5,26.36 4.5,26.36 ; 36.5,-1 36.5,-1 ; 36.5,26.36 cw(c36.5,20.86) 36.502,26.36 ; 36.5,26.36 cw(c36.5,25.36) 36.502,26.36 ; 36.502,26.36 cw(c36.5,20.86) 42,20.863 ; 42,20.863 cw(c41,20.86) 42,20.86 ccw(c36.5,20.86) 42,20.863
Board:
  the board outline again, w0.05
Mechanical 33:
  lines w0.05: 8.44,1.25 9.07,1.25 ; 9.07,0.62 9.07,1.25 ; 9.07,1.88 9.07,1.25 ; 9.7,1.25 9.07,1.25 ; 10.98,1.25 11.61,1.25 ; 11.61,0.62 11.61,1.25 ; 11.61,1.88 11.61,1.25 ; 12.24,1.25 11.61,1.25 ; 13.52,1.25 14.15,1.25 ; 14.15,0.62 14.15,1.25 ; 14.15,1.88 14.15,1.25 ; 14.78,1.25 14.15,1.25 ; 16.06,1.25 16.69,1.25 ; 16.06,24.11 16.69,24.11 ; 16.69,0.62 16.69,1.25 ; 16.69,1.88 16.69,1.25 ; 16.69,23.48 16.69,24.11 ; 16.69,24.74 16.69,24.11 ; 17.32,1.25 16.69,1.25 ; 17.32,24.11 16.69,24.11 ; 18.6,1.25 19.23,1.25 ; 18.6,24.11 19.23,24.11 ; 19.23,0.62 19.23,1.25 ; 19.23,1.88 19.23,1.25 ; 19.23,23.48 19.23,24.11 ; 19.23,24.74 19.23,24.11 ; 19.86,1.25 19.23,1.25 ; 19.86,24.11 19.23,24.11 ; 21.14,1.25 21.77,1.25 ; 21.14,24.11 21.77,24.11 ; 21.77,0.62 21.77,1.25 ; 21.77,1.88 21.77,1.25 ; 21.77,23.48 21.77,24.11 ; 21.77,24.74 21.77,24.11 ; 22.4,1.25 21.77,1.25 ; 22.4,24.11 21.77,24.11 ; 23.68,1.25 24.31,1.25 ; 23.68,24.11 24.31,24.11 ; 24.31,0.62 24.31,1.25 ; 24.31,1.88 24.31,1.25 ; 24.31,23.48 24.31,24.11 ; 24.31,24.74 24.31,24.11 ; 24.94,1.25 24.31,1.25 ; 24.94,24.11 24.31,24.11 ; 26.22,1.25 26.85,1.25 ; 26.85,0.62 26.85,1.25 ; 26.85,1.88 26.85,1.25 ; 27.48,1.25 26.85,1.25 ; 28.76,1.25 29.39,1.25 ; 29.39,0.62 29.39,1.25 ; 29.39,1.88 29.39,1.25 ; 30.02,1.25 29.39,1.25 ; 31.3,1.25 31.93,1.25 ; 31.93,0.62 31.93,1.25 ; 31.93,1.88 31.93,1.25 ; 32.56,1.25 31.93,1.25
Mechanical 66:
  circle w0.05: c36.5,4.68 r2.85
  circle w0.05: c36.5,20.68 r2.85
  circle w0.05: c4.5,20.68 r2.85
  circle w0.05: c4.5,4.68 r2.85